# Altium PCB Switch Matrix PCB.PcbDoc (part 3 of 3)
Units mil, origin at the board's own origin, x right, y up, seen from the top; angles counter-clockwise.
Board outline 3937.01 x 7874.02 mil, 2 copper layers (Top Layer, Bottom Layer), stack 62.8 mil thick; 178 components, 222 nets, 852 pads, 317 vias.
Unrouted connection lines stored in the file: 1.
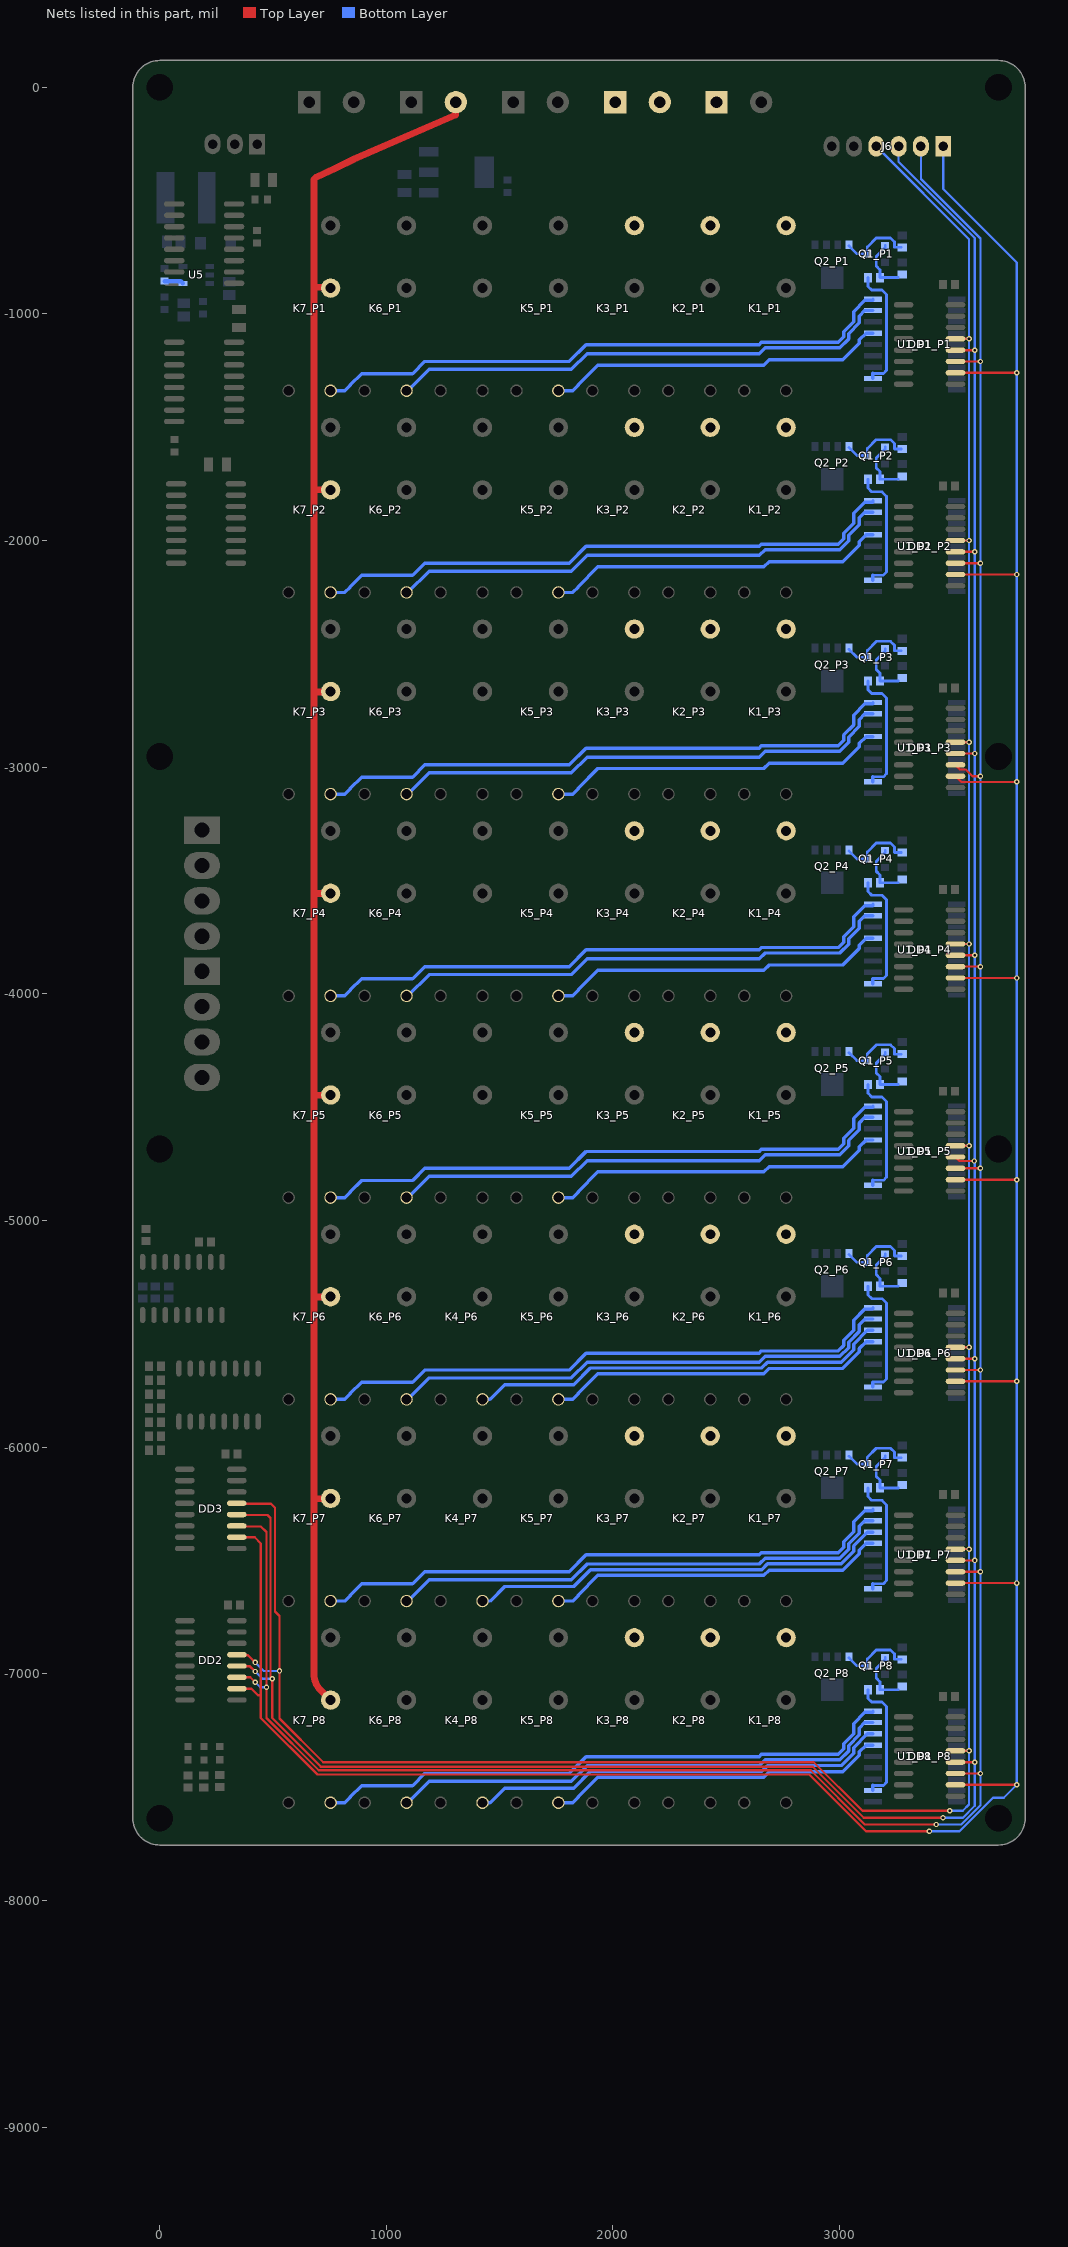
[diagram p3: the nets of this part, all layers, seen from the top]

## Via types
v1: diameter 23.62, hole 11.81, Top Layer to Bottom Layer, 315 vias
v2: diameter 31.5, hole 15.75, Top Layer to Bottom Layer, 2 vias

## Nets (pads, with @x,y where several pads share a name; then routed paths per layer and width w, separated by ;. In a path a pad name is that pad's centre, name@x,y a point inside that pad or via, vN(x,y) a via of type N, cw(c..) or ccw(c..) an arc to the next point about the centre after c; other vN are vias at no path point) (continued)
NetK4_P6_1: K4_P6.1 U1_P6.16 | length 1862.4
  Bottom Layer w15: K4_P6.1@1424.41,-5789.25 1457.72,-5789.25 1521.89,-5725.08 1826.89,-5725.08 1901.06,-5650.91 2656.06,-5650.91 2681.89,-5625.08 3006.89,-5625.08 3061.89,-5570.08 3061.89,-5546.23 3123.04,-5485.08 U1_P6.16@3146.85,-5485.08
NetK4_P7_1: K4_P7.1 U1_P7.16 | length 1862.4
  Bottom Layer w15: K4_P7.1@1424.41,-6679.25 1457.72,-6679.25 1521.89,-6615.08 1826.89,-6615.08 1901.06,-6540.91 2656.06,-6540.91 2681.89,-6515.08 3006.89,-6515.08 3061.89,-6460.08 3061.89,-6436.23 3123.04,-6375.08 U1_P7.16@3146.85,-6375.08
NetK4_P8_1: K4_P8.1 U1_P8.16 | length 1862.4
  Bottom Layer w15: K4_P8.1@1424.41,-7569.25 1457.72,-7569.25 1521.89,-7505.08 1826.89,-7505.08 1901.06,-7430.91 2656.06,-7430.91 2681.89,-7405.08 3006.89,-7405.08 3061.89,-7350.08 3061.89,-7326.23 3123.04,-7265.08 U1_P8.16@3146.85,-7265.08
NetK5_P1_1: K5_P1.1 U1_P1.15 | length 1502.8
  Bottom Layer w15: K5_P1.1@1759.41,-1339.25 1822.41,-1339.25 1846.38,-1315.28 1846.38,-1313.16 1933.63,-1225.91 2666.06,-1225.91 2688.89,-1203.08 3013.89,-1203.08 3086.89,-1130.08 3086.89,-1115.08 3116.89,-1085.08 U1_P1.15@3146.85,-1085.08
NetK5_P2_1: K5_P2.1 U1_P2.15 | length 1502.8
  Bottom Layer w15: K5_P2.1@1759.41,-2229.25 1822.41,-2229.25 1846.38,-2205.28 1846.38,-2203.16 1933.63,-2115.91 2666.06,-2115.91 2688.89,-2093.08 3013.89,-2093.08 3086.89,-2020.08 3086.89,-2005.08 3116.89,-1975.08 U1_P2.15@3146.85,-1975.08
NetK5_P3_1: K5_P3.1 U1_P3.15 | length 1502.8
  Bottom Layer w15: K5_P3.1@1759.41,-3119.25 1822.41,-3119.25 1846.38,-3095.28 1846.38,-3093.16 1933.63,-3005.91 2666.06,-3005.91 2688.89,-2983.08 3013.89,-2983.08 3086.89,-2910.08 3086.89,-2895.08 3116.89,-2865.08 U1_P3.15@3146.85,-2865.08
NetK5_P4_1: K5_P4.1 U1_P4.15 | length 1502.8
  Bottom Layer w15: K5_P4.1@1759.41,-4009.25 1822.41,-4009.25 1846.38,-3985.28 1846.38,-3983.16 1933.63,-3895.91 2666.06,-3895.91 2688.89,-3873.08 3013.89,-3873.08 3086.89,-3800.08 3086.89,-3785.08 3116.89,-3755.08 U1_P4.15@3146.85,-3755.08
NetK5_P5_1: K5_P5.1 U1_P5.15 | length 1502.8
  Bottom Layer w15: K5_P5.1@1759.41,-4899.25 1822.41,-4899.25 1846.38,-4875.28 1846.38,-4873.16 1933.63,-4785.91 2666.06,-4785.91 2688.89,-4763.08 3013.89,-4763.08 3086.89,-4690.08 3086.89,-4675.08 3116.89,-4645.08 U1_P5.15@3146.85,-4645.08
NetK5_P6_1: K5_P6.1 U1_P6.15 | length 1502.8
  Bottom Layer w15: K5_P6.1@1759.41,-5789.25 1822.41,-5789.25 1846.38,-5765.28 1846.38,-5763.16 1933.63,-5675.91 2666.06,-5675.91 2688.89,-5653.08 3013.89,-5653.08 3086.89,-5580.08 3086.89,-5565.08 3116.89,-5535.08 U1_P6.15@3146.85,-5535.08
NetK5_P7_1: K5_P7.1 U1_P7.15 | length 1502.8
  Bottom Layer w15: K5_P7.1@1759.41,-6679.25 1822.41,-6679.25 1846.38,-6655.28 1846.38,-6653.16 1933.63,-6565.91 2666.06,-6565.91 2688.89,-6543.08 3013.89,-6543.08 3086.89,-6470.08 3086.89,-6455.08 3116.89,-6425.08 U1_P7.15@3146.85,-6425.08
NetK5_P8_1: K5_P8.1 U1_P8.15 | length 1502.8
  Bottom Layer w15: K5_P8.1@1759.41,-7569.25 1822.41,-7569.25 1846.38,-7545.28 1846.38,-7543.16 1933.63,-7455.91 2666.06,-7455.91 2688.89,-7433.08 3013.89,-7433.08 3086.89,-7360.08 3086.89,-7345.08 3116.89,-7315.08 U1_P8.15@3146.85,-7315.08
NetK6_P1_1: K6_P1.1 U1_P1.17 | length 2235.7
  Bottom Layer w15: K6_P1.1@1089.41,-1339.25 1095.03,-1339.25 1189.2,-1245.08 1816.89,-1245.08 1886.06,-1175.91 2646.06,-1175.91 2671.89,-1150.08 3000.78,-1150.08 3039.89,-1110.97 3039.89,-1087.12 3086.89,-1040.12 3086.89,-1010.08 3111.89,-985.08 U1_P1.17@3146.85,-985.08
NetK6_P2_1: K6_P2.1 U1_P2.17 | length 2235.7
  Bottom Layer w15: K6_P2.1@1089.41,-2229.25 1095.03,-2229.25 1189.2,-2135.08 1816.89,-2135.08 1886.06,-2065.91 2646.06,-2065.91 2671.89,-2040.08 3000.78,-2040.08 3039.89,-2000.97 3039.89,-1977.12 3086.89,-1930.12 3086.89,-1900.08 3111.89,-1875.08 U1_P2.17@3146.85,-1875.08
NetK6_P3_1: K6_P3.1 U1_P3.17 | length 2235.7
  Bottom Layer w15: K6_P3.1@1089.41,-3119.25 1095.03,-3119.25 1189.2,-3025.08 1816.89,-3025.08 1886.06,-2955.91 2646.06,-2955.91 2671.89,-2930.08 3000.78,-2930.08 3039.89,-2890.97 3039.89,-2867.12 3086.89,-2820.12 3086.89,-2790.08 3111.89,-2765.08 U1_P3.17@3146.85,-2765.08
NetK6_P4_1: K6_P4.1 U1_P4.17 | length 2235.7
  Bottom Layer w15: K6_P4.1@1089.41,-4009.25 1095.03,-4009.25 1189.2,-3915.08 1816.89,-3915.08 1886.06,-3845.91 2646.06,-3845.91 2671.89,-3820.08 3000.78,-3820.08 3039.89,-3780.97 3039.89,-3757.12 3086.89,-3710.12 3086.89,-3680.08 3111.89,-3655.08 U1_P4.17@3146.85,-3655.08
NetK6_P5_1: K6_P5.1 U1_P5.17 | length 2235.7
  Bottom Layer w15: K6_P5.1@1089.41,-4899.25 1095.03,-4899.25 1189.2,-4805.08 1816.89,-4805.08 1886.06,-4735.91 2646.06,-4735.91 2671.89,-4710.08 3000.78,-4710.08 3039.89,-4670.97 3039.89,-4647.12 3086.89,-4600.12 3086.89,-4570.08 3111.89,-4545.08 U1_P5.17@3146.85,-4545.08
NetK6_P6_1: K6_P6.1 U1_P6.17 | length 2235.7
  Bottom Layer w15: K6_P6.1@1089.41,-5789.25 1095.03,-5789.25 1189.2,-5695.08 1816.89,-5695.08 1886.06,-5625.91 2646.06,-5625.91 2671.89,-5600.08 3000.78,-5600.08 3039.89,-5560.97 3039.89,-5537.12 3086.89,-5490.12 3086.89,-5460.08 3111.89,-5435.08 U1_P6.17@3146.85,-5435.08
NetK6_P7_1: K6_P7.1 U1_P7.17 | length 2235.7
  Bottom Layer w15: K6_P7.1@1089.41,-6679.25 1095.03,-6679.25 1189.2,-6585.08 1816.89,-6585.08 1886.06,-6515.91 2646.06,-6515.91 2671.89,-6490.08 3000.78,-6490.08 3039.89,-6450.97 3039.89,-6427.12 3086.89,-6380.12 3086.89,-6350.08 3111.89,-6325.08 U1_P7.17@3146.85,-6325.08
NetK6_P8_1: K6_P8.1 U1_P8.17 | length 2235.7
  Bottom Layer w15: K6_P8.1@1089.41,-7569.25 1095.03,-7569.25 1189.2,-7475.08 1816.89,-7475.08 1886.06,-7405.91 2646.06,-7405.91 2671.89,-7380.08 3000.78,-7380.08 3039.89,-7340.97 3039.89,-7317.12 3086.89,-7270.12 3086.89,-7240.08 3111.89,-7215.08 U1_P8.17@3146.85,-7215.08
NetK7_P1_1: K7_P1.1 U1_P1.18 | length 2604.6
  Bottom Layer w15: K7_P1.1@754.41,-1339.25 817.41,-1339.25 841.38,-1315.28 841.38,-1313.16 890.74,-1263.8 1115.79,-1263.8 1169.5,-1210.08 1806.89,-1210.08 1881.06,-1135.91 2644.95,-1135.91 2654.95,-1125.91 2993.84,-1125.91 3017.89,-1101.85 3017.89,-1078.01 3061.89,-1034.01 3061.89,-990.08 3111.24,-940.73 3147.32,-940.73 U1_P1.18@3147.32,-935.08
NetK7_P2_1: K7_P2.1 U1_P2.18 | length 2604.6
  Bottom Layer w15: K7_P2.1@754.41,-2229.25 817.41,-2229.25 841.38,-2205.28 841.38,-2203.16 890.74,-2153.8 1115.79,-2153.8 1169.5,-2100.08 1806.89,-2100.08 1881.06,-2025.91 2644.95,-2025.91 2654.95,-2015.91 2993.84,-2015.91 3017.89,-1991.85 3017.89,-1968.01 3061.89,-1924.01 3061.89,-1880.08 3111.24,-1830.73 3147.32,-1830.73 U1_P2.18@3147.32,-1825.08
NetK7_P3_1: K7_P3.1 U1_P3.18 | length 2604.6
  Bottom Layer w15: K7_P3.1@754.41,-3119.25 817.41,-3119.25 841.38,-3095.28 841.38,-3093.16 890.74,-3043.8 1115.79,-3043.8 1169.5,-2990.08 1806.89,-2990.08 1881.06,-2915.91 2644.95,-2915.91 2654.95,-2905.91 2993.84,-2905.91 3017.89,-2881.85 3017.89,-2858.01 3061.89,-2814.01 3061.89,-2770.08 3111.24,-2720.73 3147.32,-2720.73 U1_P3.18@3147.32,-2715.08
NetK7_P4_1: K7_P4.1 U1_P4.18 | length 2604.6
  Bottom Layer w15: K7_P4.1@754.41,-4009.25 817.41,-4009.25 841.38,-3985.28 841.38,-3983.16 890.74,-3933.8 1115.79,-3933.8 1169.5,-3880.08 1806.89,-3880.08 1881.06,-3805.91 2644.95,-3805.91 2654.95,-3795.91 2993.84,-3795.91 3017.89,-3771.85 3017.89,-3748.01 3061.89,-3704.01 3061.89,-3660.08 3111.24,-3610.73 3147.32,-3610.73 U1_P4.18@3147.32,-3605.08
NetK7_P5_1: K7_P5.1 U1_P5.18 | length 2604.6
  Bottom Layer w15: K7_P5.1@754.41,-4899.25 817.41,-4899.25 841.38,-4875.28 841.38,-4873.16 890.74,-4823.8 1115.79,-4823.8 1169.5,-4770.08 1806.89,-4770.08 1881.06,-4695.91 2644.95,-4695.91 2654.95,-4685.91 2993.84,-4685.91 3017.89,-4661.85 3017.89,-4638.01 3061.89,-4594.01 3061.89,-4550.08 3111.24,-4500.73 3147.32,-4500.73 U1_P5.18@3147.32,-4495.08
NetK7_P6_1: K7_P6.1 U1_P6.18 | length 2604.6
  Bottom Layer w15: K7_P6.1@754.41,-5789.25 817.41,-5789.25 841.38,-5765.28 841.38,-5763.16 890.74,-5713.8 1115.79,-5713.8 1169.5,-5660.08 1806.89,-5660.08 1881.06,-5585.91 2644.95,-5585.91 2654.95,-5575.91 2993.84,-5575.91 3017.89,-5551.85 3017.89,-5528.01 3061.89,-5484.01 3061.89,-5440.08 3111.24,-5390.73 3147.32,-5390.73 U1_P6.18@3147.32,-5385.08
NetK7_P7_1: K7_P7.1 U1_P7.18 | length 2604.6
  Bottom Layer w15: K7_P7.1@754.41,-6679.25 817.41,-6679.25 841.38,-6655.28 841.38,-6653.16 890.74,-6603.8 1115.79,-6603.8 1169.5,-6550.08 1806.89,-6550.08 1881.06,-6475.91 2644.95,-6475.91 2654.95,-6465.91 2993.84,-6465.91 3017.89,-6441.85 3017.89,-6418.01 3061.89,-6374.01 3061.89,-6330.08 3111.24,-6280.73 3147.32,-6280.73 U1_P7.18@3147.32,-6275.08
NetK7_P8_1: K7_P8.1 U1_P8.18 | length 2604.6
  Bottom Layer w15: K7_P8.1@754.41,-7569.25 817.41,-7569.25 841.38,-7545.28 841.38,-7543.16 890.74,-7493.8 1115.79,-7493.8 1169.5,-7440.08 1806.89,-7440.08 1881.06,-7365.91 2644.95,-7365.91 2654.95,-7355.91 2993.84,-7355.91 3017.89,-7331.85 3017.89,-7308.01 3061.89,-7264.01 3061.89,-7220.08 3111.24,-7170.73 3147.32,-7170.73 U1_P8.18@3147.32,-7165.08
NetQ1_P1_1: Q1_P1.1 R1_P1.2 R2_P1.1 | length 245.6
  Bottom Layer w12: Q1_P1.1@3201.26,-697.68 3201.26,-707.02 3161.89,-746.39 3161.89,-789.2 3178.46,-805.78 R2_P1.1@3178.46,-840.08 R1_P1.2@3258.46,-840.08
NetQ1_P1_3: Q1_P1.3 Q2_P1.4 R3_P1.2 | length 323
  Bottom Layer w12: Q2_P1.4@3041.89,-700.08 3076.89,-735.08 Q1_P1.3@3122.52,-735.08 3122.52,-704.45 3161.89,-665.08 3224.75,-665.08 3241.89,-682.22 3241.89,-706.65 R3_P1.2@3271.89,-706.65
NetQ1_P2_1: Q1_P2.1 R1_P2.2 R2_P2.1 | length 245.6
  Bottom Layer w12: Q1_P2.1@3201.26,-1587.68 3201.26,-1597.02 3161.89,-1636.39 3161.89,-1679.2 3178.46,-1695.78 R2_P2.1@3178.46,-1730.08 R1_P2.2@3258.46,-1730.08
NetQ1_P2_3: Q1_P2.3 Q2_P2.4 R3_P2.2 | length 323
  Bottom Layer w12: Q2_P2.4@3041.89,-1590.08 3076.89,-1625.08 Q1_P2.3@3122.52,-1625.08 3122.52,-1594.45 3161.89,-1555.08 3224.75,-1555.08 3241.89,-1572.22 3241.89,-1596.65 R3_P2.2@3271.89,-1596.65
NetQ1_P3_1: Q1_P3.1 R1_P3.2 R2_P3.1 | length 245.6
  Bottom Layer w12: Q1_P3.1@3201.26,-2477.68 3201.26,-2487.02 3161.89,-2526.39 3161.89,-2569.2 3178.46,-2585.78 R2_P3.1@3178.46,-2620.08 R1_P3.2@3258.46,-2620.08
NetQ1_P3_3: Q1_P3.3 Q2_P3.4 R3_P3.2 | length 323
  Bottom Layer w12: Q2_P3.4@3041.89,-2480.08 3076.89,-2515.08 Q1_P3.3@3122.52,-2515.08 3122.52,-2484.45 3161.89,-2445.08 3224.75,-2445.08 3241.89,-2462.22 3241.89,-2486.65 R3_P3.2@3271.89,-2486.65
NetQ1_P4_1: Q1_P4.1 R1_P4.2 R2_P4.1 | length 245.6
  Bottom Layer w12: Q1_P4.1@3201.26,-3367.68 3201.26,-3377.02 3161.89,-3416.39 3161.89,-3459.2 3178.46,-3475.78 R2_P4.1@3178.46,-3510.08 R1_P4.2@3258.46,-3510.08
NetQ1_P4_3: Q1_P4.3 Q2_P4.4 R3_P4.2 | length 323
  Bottom Layer w12: Q2_P4.4@3041.89,-3370.08 3076.89,-3405.08 Q1_P4.3@3122.52,-3405.08 3122.52,-3374.45 3161.89,-3335.08 3224.75,-3335.08 3241.89,-3352.22 3241.89,-3376.65 R3_P4.2@3271.89,-3376.65
NetQ1_P5_1: Q1_P5.1 R1_P5.2 R2_P5.1 | length 245.6
  Bottom Layer w12: Q1_P5.1@3201.26,-4257.68 3201.26,-4267.02 3161.89,-4306.39 3161.89,-4349.2 3178.46,-4365.78 R2_P5.1@3178.46,-4400.08 R1_P5.2@3258.46,-4400.08
NetQ1_P5_3: Q1_P5.3 Q2_P5.4 R3_P5.2 | length 323
  Bottom Layer w12: Q2_P5.4@3041.89,-4260.08 3076.89,-4295.08 Q1_P5.3@3122.52,-4295.08 3122.52,-4264.45 3161.89,-4225.08 3224.75,-4225.08 3241.89,-4242.22 3241.89,-4266.65 R3_P5.2@3271.89,-4266.65
NetQ1_P6_1: Q1_P6.1 R1_P6.2 R2_P6.1 | length 245.6
  Bottom Layer w12: Q1_P6.1@3201.26,-5147.68 3201.26,-5157.02 3161.89,-5196.39 3161.89,-5239.2 3178.46,-5255.78 R2_P6.1@3178.46,-5290.08 R1_P6.2@3258.46,-5290.08
NetQ1_P6_3: Q1_P6.3 Q2_P6.4 R3_P6.2 | length 323
  Bottom Layer w12: Q2_P6.4@3041.89,-5150.08 3076.89,-5185.08 Q1_P6.3@3122.52,-5185.08 3122.52,-5154.45 3161.89,-5115.08 3224.75,-5115.08 3241.89,-5132.22 3241.89,-5156.65 R3_P6.2@3271.89,-5156.65
NetQ1_P7_1: Q1_P7.1 R1_P7.2 R2_P7.1 | length 245.6
  Bottom Layer w12: Q1_P7.1@3201.26,-6037.68 3201.26,-6047.02 3161.89,-6086.39 3161.89,-6129.2 3178.46,-6145.78 R2_P7.1@3178.46,-6180.08 R1_P7.2@3258.46,-6180.08
NetQ1_P7_3: Q1_P7.3 Q2_P7.4 R3_P7.2 | length 323
  Bottom Layer w12: Q2_P7.4@3041.89,-6040.08 3076.89,-6075.08 Q1_P7.3@3122.52,-6075.08 3122.52,-6044.45 3161.89,-6005.08 3224.75,-6005.08 3241.89,-6022.22 3241.89,-6046.65 R3_P7.2@3271.89,-6046.65
NetQ1_P8_1: Q1_P8.1 R1_P8.2 R2_P8.1 | length 245.6
  Bottom Layer w12: Q1_P8.1@3201.26,-6927.68 3201.26,-6937.02 3161.89,-6976.39 3161.89,-7019.2 3178.46,-7035.78 R2_P8.1@3178.46,-7070.08 R1_P8.2@3258.46,-7070.08
NetQ1_P8_3: Q1_P8.3 Q2_P8.4 R3_P8.2 | length 323
  Bottom Layer w12: Q2_P8.4@3041.89,-6930.08 3076.89,-6965.08 Q1_P8.3@3122.52,-6965.08 3122.52,-6934.45 3161.89,-6895.08 3224.75,-6895.08 3241.89,-6912.22 3241.89,-6936.65 R3_P8.2@3271.89,-6936.65
NetR2_P1_2: R2_P1.2 U1_P1.11 | length 557
  Bottom Layer w12: R2_P1.2@3125.32,-840.08 3125.32,-878.5 3141.89,-895.08 3186.89,-895.08 3206.89,-915.08 3206.89,-1248.85 3192.85,-1262.89 3146.85,-1262.89
  Bottom Layer w15: U1_P1.11@3146.85,-1285.08 3146.85,-1262.89
NetR2_P2_2: R2_P2.2 U1_P2.11 | length 557
  Bottom Layer w12: R2_P2.2@3125.32,-1730.08 3125.32,-1768.5 3141.89,-1785.08 3186.89,-1785.08 3206.89,-1805.08 3206.89,-2138.85 3192.85,-2152.89 3146.85,-2152.89
  Bottom Layer w15: U1_P2.11@3146.85,-2175.08 3146.85,-2152.89
NetR2_P3_2: R2_P3.2 U1_P3.11 | length 557
  Bottom Layer w12: R2_P3.2@3125.32,-2620.08 3125.32,-2658.5 3141.89,-2675.08 3186.89,-2675.08 3206.89,-2695.08 3206.89,-3028.85 3192.85,-3042.89 3146.85,-3042.89
  Bottom Layer w15: U1_P3.11@3146.85,-3065.08 3146.85,-3042.89
NetR2_P4_2: R2_P4.2 U1_P4.11 | length 557
  Bottom Layer w12: R2_P4.2@3125.32,-3510.08 3125.32,-3548.5 3141.89,-3565.08 3186.89,-3565.08 3206.89,-3585.08 3206.89,-3918.85 3192.85,-3932.89 3146.85,-3932.89
  Bottom Layer w15: U1_P4.11@3146.85,-3955.08 3146.85,-3932.89
NetR2_P5_2: R2_P5.2 U1_P5.11 | length 557
  Bottom Layer w12: R2_P5.2@3125.32,-4400.08 3125.32,-4438.5 3141.89,-4455.08 3186.89,-4455.08 3206.89,-4475.08 3206.89,-4808.85 3192.85,-4822.89 3146.85,-4822.89
  Bottom Layer w15: U1_P5.11@3146.85,-4845.08 3146.85,-4822.89
NetR2_P6_2: R2_P6.2 U1_P6.11 | length 557
  Bottom Layer w12: R2_P6.2@3125.32,-5290.08 3125.32,-5328.5 3141.89,-5345.08 3186.89,-5345.08 3206.89,-5365.08 3206.89,-5698.85 3192.85,-5712.89 3146.85,-5712.89
  Bottom Layer w15: U1_P6.11@3146.85,-5735.08 3146.85,-5712.89
NetR2_P7_2: R2_P7.2 U1_P7.11 | length 557
  Bottom Layer w12: R2_P7.2@3125.32,-6180.08 3125.32,-6218.5 3141.89,-6235.08 3186.89,-6235.08 3206.89,-6255.08 3206.89,-6588.85 3192.85,-6602.89 3146.85,-6602.89
  Bottom Layer w15: U1_P7.11@3146.85,-6625.08 3146.85,-6602.89
NetR2_P8_2: R2_P8.2 U1_P8.11 | length 557
  Bottom Layer w12: R2_P8.2@3125.32,-7070.08 3125.32,-7108.5 3141.89,-7125.08 3186.89,-7125.08 3206.89,-7145.08 3206.89,-7478.85 3192.85,-7492.89 3146.85,-7492.89
  Bottom Layer w15: U1_P8.11@3146.85,-7515.08 3146.85,-7492.89
NetR5_1: R5.1 U5.4 | length 85
  Bottom Layer w20: R5.1@21.97,-855.35 93.06,-855.35 U5.4@102.91,-865.2
OE: DD1_P1.13 DD1_P2.13 DD1_P3.13 DD1_P4.13 DD1_P5.13 DD1_P6.13 DD1_P7.13 DD1_P8.13 DD2.13 DD3.13 J6.4 | length 12541.1
  Top Layer w10: DD3.13@339.76,-6247.8 342.05,-6250.08 491.38,-6250.08 508.88,-6267.58 508.88,-6725.08 528.88,-6745.08 v1(528.88,-6987.58) 528.88,-7197.58 721.38,-7390.08 2886.38,-7390.08 3101.38,-7605.08 v1(3486.38,-7605.08) ; DD2.13@340.87,-6915.91 343.47,-6918.51 389.81,-6918.51 v1(421.38,-6950.08) ; J6.4@3161.89,-270.91 J6.4@3161.89,-260.91 ; DD1_P8.13@3511.38,-7340.08 v1(3571.38,-7340.08) ; DD1_P7.13@3511.38,-6450.08 v1(3571.38,-6450.08) ; DD1_P6.13@3511.38,-5560.08 v1(3571.38,-5560.08) ; DD1_P5.13@3511.38,-4670.08 v1(3571.38,-4670.08) ; DD1_P4.13@3511.38,-3780.08 v1(3571.38,-3780.08) ; DD1_P3.13@3511.38,-2890.08 v1(3571.38,-2890.08) ; DD1_P2.13@3511.38,-2000.08 v1(3571.38,-2000.08) ; DD1_P1.13@3511.38,-1110.08 v1(3571.38,-1110.08)
  Top Layer w12: J6.4@3161.89,-260.91 3168.9,-260.91 J6.4@3170.79,-262.8
  Bottom Layer w10: v1(421.38,-6950.08) 421.38,-6955.08 421.93,-6954.53 425.83,-6954.53 458.88,-6987.58 v1(528.88,-6987.58) ; J6.4@3161.89,-270.91 3171.91,-270.91 3571.38,-670.38 v1(3571.38,-1110.08) v1(3571.38,-2000.08) v1(3571.38,-2890.08) v1(3571.38,-3780.08) v1(3571.38,-4670.08) v1(3571.38,-5560.08) v1(3571.38,-6450.08) v1(3571.38,-7340.08) 3571.38,-7577.37 3543.67,-7605.08 v1(3486.38,-7605.08)
RST: DD1_P1.10 DD1_P2.10 DD1_P3.10 DD1_P4.10 DD1_P5.10 DD1_P6.10 DD1_P7.10 DD1_P8.10 DD2.10 DD3.10 J6.1 | length 14196
  Top Layer w10: DD3.10@339.76,-6397.8 419.09,-6397.8 446.38,-6425.08 446.38,-7095.08 ; DD2.10@340.87,-7065.91 404.71,-7065.91 433.88,-7095.08 446.38,-7095.08 ; v1(3396.38,-7695.08) 3116.38,-7695.08 2866.38,-7445.08 696.38,-7445.08 446.38,-7195.08 446.38,-7095.08 ; J6.1@3457.17,-260.91 3475.79,-279.53 J6.1@3475.79,-282.8 ; DD1_P8.10@3511.38,-7490.08 v1(3781.38,-7490.08) ; DD1_P7.10@3511.38,-6600.08 v1(3781.38,-6600.08) ; DD1_P6.10@3511.38,-5710.08 v1(3781.38,-5710.08) ; DD1_P5.10@3511.38,-4820.08 v1(3781.38,-4820.08) ; DD1_P4.10@3511.38,-3930.08 v1(3781.38,-3930.08) ; DD1_P3.10@3511.38,-3040.08 3536.38,-3065.08 v1(3781.38,-3065.08) ; DD1_P2.10@3511.38,-2150.08 v1(3781.38,-2150.08) ; DD1_P1.10@3511.38,-1260.08 v1(3781.38,-1260.08)
  Bottom Layer w10: v1(3396.38,-7695.08) 3529.26,-7695.08 3676.76,-7547.58 3723.88,-7547.58 v1(3781.38,-7490.08) v1(3781.38,-6600.08) v1(3781.38,-5710.08) v1(3781.38,-4820.08) v1(3781.38,-3930.08) v1(3781.38,-3065.08) v1(3781.38,-2150.08) v1(3781.38,-1260.08) 3781.38,-773.38 3457.17,-449.16 J6.1@3457.17,-260.91
SHCP: DD1_P1.11 DD1_P2.11 DD1_P3.11 DD1_P4.11 DD1_P5.11 DD1_P6.11 DD1_P7.11 DD1_P8.11 DD2.11 DD3.11 J6.2 | length 12820.4
  Top Layer w10: DD3.11@339.76,-6347.8 342.05,-6350.08 446.38,-6350.08 471.38,-6375.08 v1(471.38,-7060.08) 471.38,-7195.08 702.38,-7426.08 2872.38,-7426.08 3111.38,-7665.08 v1(3426.38,-7665.08) ; DD2.11@340.87,-7015.91 399.71,-7015.91 v1(421.38,-7037.58) ; DD1_P8.11@3511.38,-7440.08 v1(3621.38,-7440.08) ; DD1_P7.11@3511.38,-6550.08 v1(3621.38,-6550.08) ; DD1_P6.11@3511.38,-5660.08 v1(3621.38,-5660.08) ; DD1_P5.11@3511.38,-4770.08 v1(3621.38,-4770.08) ; DD1_P4.11@3511.38,-3880.08 v1(3621.38,-3880.08) ; DD1_P3.11@3511.38,-2990.08 3531.38,-3010.08 3556.38,-3010.08 3586.38,-3040.08 v1(3621.38,-3040.08) ; DD1_P2.11@3511.38,-2100.08 v1(3621.38,-2100.08) ; DD1_P1.11@3511.38,-1210.08 v1(3621.38,-1210.08)
  Bottom Layer w10: v1(421.38,-7037.58) 443.88,-7060.08 v1(471.38,-7060.08) ; J6.2@3358.74,-260.91 3358.74,-404.74 3621.38,-667.38 v1(3621.38,-1210.08) v1(3621.38,-2100.08) v1(3621.38,-3040.08) v1(3621.38,-3880.08) v1(3621.38,-4770.08) v1(3621.38,-5660.08) v1(3621.38,-6550.08) v1(3621.38,-7440.08) 3621.38,-7580.33 3536.63,-7665.08 v1(3426.38,-7665.08)
STCP: DD1_P1.12 DD1_P2.12 DD1_P3.12 DD1_P4.12 DD1_P5.12 DD1_P6.12 DD1_P7.12 DD1_P8.12 DD2.12 DD3.12 J6.3 | length 12683.3
  Top Layer w10: DD3.12@339.76,-6297.8 342.05,-6300.08 476.38,-6300.08 488.88,-6312.58 488.88,-7015.08 v1(496.38,-7022.58) 496.38,-7195.08 711.38,-7410.08 2881.38,-7410.08 3106.38,-7635.08 v1(3456.38,-7635.08) ; DD2.12@340.87,-6965.91 342.54,-6967.58 398.88,-6967.58 v1(421.38,-6990.08) ; DD1_P8.12@3511.38,-7390.08 v1(3596.38,-7390.08) ; DD1_P7.12@3511.38,-6500.08 v1(3596.38,-6500.08) ; DD1_P6.12@3511.38,-5610.08 v1(3596.38,-5610.08) ; DD1_P5.12@3511.38,-4720.08 3529.13,-4737.83 v1(3594.19,-4737.83) ; DD1_P4.12@3511.38,-3830.08 v1(3596.38,-3830.08) ; DD1_P3.12@3511.38,-2940.08 v1(3596.38,-2940.08) ; DD1_P2.12@3511.38,-2050.08 v1(3596.38,-2050.08) ; DD1_P1.12@3511.38,-1160.08 v1(3596.38,-1160.08)
  Top Layer w12: J6.3@3260.32,-260.91 3263.9,-260.91 J6.3@3270.79,-267.8
  Bottom Layer w10: v1(421.38,-6990.08) 453.88,-7022.58 v1(496.38,-7022.58) ; J6.3@3260.32,-260.91 3260.32,-329.32 3596.38,-665.38 v1(3596.38,-1160.08) v1(3596.38,-2050.08) v1(3596.38,-2940.08) v1(3596.38,-3830.08) v1(3596.38,-5610.08) v1(3596.38,-6500.08) v1(3596.38,-7390.08) 3596.38,-7582.71 3544.01,-7635.08 v1(3456.38,-7635.08)
V: J4.1 K7_P1.2 K7_P2.2 K7_P3.2 K7_P4.2 K7_P5.2 K7_P6.2 K7_P7.2 K7_P8.2 | length 8573.5
  Top Layer w20: 680.79,-1776.5 680.79,-1777.8 ; 680.79,-407.17 689.09,-398.86 ; K7_P1.2@745.48,-882.8 cw(c745.48,-895.43) K7_P1.2@754.41,-886.5 ; K7_P7.2@753.11,-6227.8 K7_P7.2@754.41,-6226.5 ; K7_P6.2@753.11,-5337.8 K7_P6.2@754.41,-5336.5 ; K7_P5.2@753.11,-4447.8 K7_P5.2@754.41,-4446.5 ; K7_P4.2@753.11,-3557.8 K7_P4.2@754.41,-3556.5 ; K7_P3.2@753.11,-2667.8 K7_P3.2@754.41,-2666.5 ; 680.79,-1777.8 cw(c683.92,-1780.93) 683.92,-1776.5 ; 680.79,-1777.8 cw(c683.92,-1780.93) 683.92,-1776.5 ; 680.79,-1777.8 cw(c683.92,-1780.93) 683.92,-1776.5 ; 680.79,-1777.8 cw(c683.92,-1780.93) 683.92,-1776.5 ; 680.79,-1777.8 cw(c683.92,-1780.93) 683.92,-1776.5 ; 680.79,-1777.8 cw(c683.92,-1780.93) 683.92,-1776.5 ; 680.79,-1777.8 cw(c683.92,-1780.93) 683.92,-1776.5 ; 680.79,-1777.8 cw(c683.92,-1780.93) 683.92,-1776.5
  Top Layer w30: 680.79,-1777.8 680.79,-2667.8 ; 680.79,-1776.5 680.79,-882.8 ; 680.79,-407.17 680.79,-882.8 ; 683.92,-1776.5 K7_P2.2@754.41,-1776.5 ; 689.09,-398.86 775.79,-357.8 855.79,-317.8 1305.79,-122.8 J4.1@1306.89,-65.91 ; K7_P1.2@745.48,-882.8 680.79,-882.8 ; K7_P7.2@753.11,-6227.8 680.79,-6227.8 ; K7_P6.2@753.11,-5337.8 680.79,-5337.8 ; K7_P5.2@753.11,-4447.8 680.79,-4447.8 ; K7_P4.2@753.11,-3557.8 680.79,-3557.8 ; K7_P3.2@753.11,-2667.8 680.79,-2667.8 ; K7_P8.2@754.41,-7116.5 710.08,-7072.16 ; 680.79,-7001.45 ccw(c780.79,-7001.45) 710.08,-7072.16 ; 680.79,-7001.45 ccw(c780.79,-7001.45) 710.08,-7072.16 ; 680.79,-7001.45 ccw(c780.79,-7001.45) 710.08,-7072.16 ; 680.79,-7001.45 ccw(c780.79,-7001.45) 710.08,-7072.16 ; 680.79,-7001.45 ccw(c780.79,-7001.45) 710.08,-7072.16 ; 680.79,-7001.45 ccw(c780.79,-7001.45) 710.08,-7072.16 ; 680.79,-7001.45 ccw(c780.79,-7001.45) 710.08,-7072.16 ; 680.79,-7001.45 ccw(c780.79,-7001.45) 710.08,-7072.16 ; 680.79,-7001.45 680.79,-6227.8 ; 680.79,-6227.8 680.79,-5337.8 ; 680.79,-5337.8 680.79,-4447.8 ; 680.79,-4447.8 680.79,-3557.8 ; 680.79,-3557.8 680.79,-2667.8
VS1: J1.2 K1_P1.3 K1_P2.3 K1_P3.3 K1_P4.3 K1_P5.3 K1_P6.3 K1_P7.3 K1_P8.3
VS2: J2.1 K2_P1.3 K2_P2.3 K2_P3.3 K2_P4.3 K2_P5.3 K2_P6.3 K2_P7.3 K2_P8.3
VS3: J2.2 K3_P1.3 K3_P2.3 K3_P3.3 K3_P4.3 K3_P5.3 K3_P6.3 K3_P7.3 K3_P8.3
pads on no net: DD3.7 U6.6 U6.7 U6.10 U6.11
copper on no net: | length 8.3
  Top Layer w10: 3612.06,-9267.13 3617.91,-9261.27

## Polygon pours and split planes (outlines as drawn)
DC_PIN8 on Bottom Layer "Bottom Layer-DC_PIN8" (solid, pour order 119): 105.78,-4287.8 240.83,-4287.8 cw(c240.83,-4327.66) 280.69,-4327.76 255,-6140 ccw(c996.75,-6166.15) 349.71,-6529.77 419.31,-6644.6 ccw(c649.06,-6505.36) 581.23,-6765.31 659.5,-6785.73 705.79,-6782.8 715.45,-7007.76 590.8,-6972.39 cw(c802.48,-6344.37) 216,-6653 165,-6564 cw(c689.52,-6231.86) 68.92,-6248.98 85.18,-5255.05 ccw(c-798.56,-5227.31) 61.94,-5024.04 51.95,-4986.39 cw(c426.73,-4886.96) 51.54,-4789.09 66.11,-4733.22 ccw(c-521.53,-4579.89) 85.79,-4579.85 85.79,-4506.54 ccw(c14.73,-4506.53) 62.33,-4453.78 cw(c85.79,-4427.8) 50.79,-4427.8 50.79,-4342.8 cw(c105.78,-4342.8)
DC_PIN1 on Bottom Layer "Bottom Layer-DC_PIN1" (solid, pour order 111): 303.25,-3314.12 ccw(c-470.61,-3280.99) 300.73,-3210.08 ccw(c-1275.16,-3516.84) 256.13,-3034.39 cw(c762.11,-2875.14) 242.69,-2767.5 cw(c1671.58,-3063.59) 282.19,-2617.51 ccw(c-640.72,-2321.2) 327.71,-2362.68 332.91,-2241.66 cw(c1036.36,-2181.61) 360.69,-1976.86 376.38,-1925.08 489.51,-1405.69 ccw(c-421.4,-1100.47) 521.38,-1285.08 666.38,-900.08 cw(c789.76,-925.23) 776.25,-800.04 cw(c954.34,-1229.65) 820.96,-784.12 cw(c899.87,-1310.5) 897.51,-778.24 643.7,-584.25 cw(c623.85,-591.99) 632.42,-611.49 ccw(c695.01,-669.49) 611.43,-652.28 ccw(c747.41,-807.66) 575.37,-693.48 ccw(c631.39,-767.3) 557.58,-711.28 494.3,-774.56 ccw(c950.97,-1094.42) 421.38,-920.08 cw(c-2418.96,-158.06) 332.91,-1195.08 cw(c-3175.36,-308.82) 243.79,-1493.23 ccw(c4717,-2269.97) 213.08,-1697.54 ccw(c2314.31,-2214.25) 150.72,-2182.12 ccw(c4173.36,-2242.14) 150.51,-2198.23 ccw(c950.8,-2298.26) 145.59,-2344.11 cw(c-391.49,-2374.77) 120.53,-2539.79 ccw(c1358.66,-2938.63) 58.46,-2899.8 ccw(c12135.07,-3313.3) 51.38,-3315.08 ccw(c88.26,-3315.1) 88.27,-3351.98 199.82,-3351.98 263.75,-3351.98 ccw(c263.75,-3312.44)
DC_PIN6 on Bottom Layer "Bottom Layer-DC_PIN6" (solid, pour order 115): 95.79,-3977.8 290.79,-3977.8 534.36,-4207.32 cw(c409.27,-4340.07) 591.67,-4338.46 594.07,-4610.62 cw(c192.76,-4614.18) 566.5,-4760.42 526.37,-4862.97 ccw(c580.19,-4884.03) 544.32,-4929.34 616.06,-4986.14 ccw(c680.17,-4905.16) 682.43,-5008.42 710.79,-5007.8 715.45,-5227.76 676.31,-5213.86 cw(c695.77,-5159.06) 658.12,-5203.38 598.88,-5153.03 ccw(c-241.34,-5854.7) 477.54,-5029.16 cw(c673.29,-4804.41) 409.85,-4943.8 cw(c517.66,-4886.76) 402.18,-4847.49 ccw(c-201.27,-4642.32) 435.79,-4662.51 435.79,-4353.18 ccw(c298.88,-4353.13) 391.22,-4252.05 283.49,-4153.55 ccw(c230.04,-4211.99) 230.03,-4132.8 100.79,-4132.8 cw(c100.79,-4082.8) 50.79,-4082.8 50.79,-4022.8 cw(c95.79,-4022.8)
DC_PIN3 on Bottom Layer "Bottom Layer-DC_PIN3" (solid, pour order 107): 50.79,-3557.8 50.79,-3612.8 ccw(c100.78,-3612.8) 100.79,-3662.8 223.69,-3662.8 ccw(c223.69,-3526.84) 284.5,-3648.44 448.05,-3566.66 ccw(c300.22,-3271.01) 608.17,-3391.16 ccw(c307.96,-3318.3) 555.13,-3132.97 cw(c837.75,-3024.7) 567.07,-2889.32 cw(c1653.72,-3326.4) 704.52,-2640.2 738.71,-2560.93 935.79,-2557.8 630.79,-2392.8 cw(c392.61,-2392.81) 602.37,-2505.64 458.1,-2773.94 ccw(c953.2,-3039.88) 431.99,-3250.08 cw(c321.64,-3303.58) 441.38,-3330.08 cw(c271.09,-3315) 417.35,-3403.51 393.38,-3438.29 cw(c347.15,-3406.44) 377.54,-3453.65 331.81,-3483.09 cw(c217.07,-3310.8) 217.05,-3517.8 90.79,-3517.8 ccw(c90.78,-3557.79)
DC_PIN5 on Bottom Layer "Bottom Layer-DC_PIN5" (solid, pour order 99): 85.79,-3822.8 319.7,-3822.8 cw(c319.7,-3923.99) 405.51,-3870.36 505.79,-4022.8 ccw(c625.92,-3966.66) 567.24,-4085.57 603.63,-4103.53 ccw(c664.79,-3979.6) 664.79,-4117.8 685.79,-4117.8 561.89,-4246.22 497.83,-4185.09 390.79,-4087.8 297.41,-3998.48 ccw(c245.88,-4052.34) 245.87,-3977.8 95.79,-3977.8 cw(c95.79,-3932.8) 50.79,-3932.8 50.79,-3857.8 cw(c85.79,-3857.8)
GND on Bottom Layer "Bottom Layer-GND" (solid, pour order 139): 3005.79,-6947.8 2870.79,-6947.8 cw(c2870.78,-6927.8) 2850.79,-6927.8 2850.79,-6807.8 cw(c2875.79,-6807.8) 2875.79,-6782.8 2980.79,-6782.79 cw(c2980.79,-6807.79) 3005.79,-6807.8
GND on Bottom Layer "Bottom Layer-GND 1" (solid, pour order 137): 3005.79,-6057.8 2870.79,-6057.8 cw(c2870.78,-6037.8) 2850.79,-6037.8 2850.79,-5917.8 cw(c2875.79,-5917.8) 2875.79,-5892.8 2980.79,-5892.79 cw(c2980.79,-5917.79) 3005.79,-5917.8
GND on Bottom Layer "Bottom Layer-GND 2" (solid, pour order 135): 3005.79,-5167.8 2870.79,-5167.8 cw(c2870.78,-5147.8) 2850.79,-5147.8 2850.79,-5027.8 cw(c2875.79,-5027.8) 2875.79,-5002.8 2980.79,-5002.79 cw(c2980.79,-5027.79) 3005.79,-5027.8
GND on Bottom Layer "Bottom Layer-GND 3" (solid, pour order 133): 3005.79,-4277.8 2870.79,-4277.8 cw(c2870.78,-4257.8) 2850.79,-4257.8 2850.79,-4137.8 cw(c2875.79,-4137.8) 2875.79,-4112.8 2980.79,-4112.79 cw(c2980.79,-4137.79) 3005.79,-4137.8
GND on Bottom Layer "Bottom Layer-GND 4" (solid, pour order 131): 3005.79,-3387.8 2870.79,-3387.8 cw(c2870.78,-3367.8) 2850.79,-3367.8 2850.79,-3247.8 cw(c2875.79,-3247.8) 2875.79,-3222.8 2980.79,-3222.79 cw(c2980.79,-3247.79) 3005.79,-3247.8
GND on Bottom Layer "Bottom Layer-GND 5" (solid, pour order 129): 3005.79,-2497.8 2870.79,-2497.8 cw(c2870.78,-2477.8) 2850.79,-2477.8 2850.79,-2357.8 cw(c2875.79,-2357.8) 2875.79,-2332.8 2980.79,-2332.79 cw(c2980.79,-2357.79) 3005.79,-2357.8
GND on Bottom Layer "Bottom Layer-GND 6" (solid, pour order 127): 3005.79,-717.8 2870.79,-717.8 cw(c2870.78,-697.8) 2850.79,-697.8 2850.79,-577.8 cw(c2875.79,-577.8) 2875.79,-552.8 2980.79,-552.79 cw(c2980.79,-577.79) 3005.79,-577.8
GND on Bottom Layer "Bottom Layer-GND 7" (solid, pour order 125): 3005.79,-1607.8 2870.79,-1607.8 cw(c2870.78,-1587.8) 2850.79,-1587.8 2850.79,-1467.8 cw(c2875.79,-1467.8) 2875.79,-1442.8 2980.79,-1442.79 cw(c2980.79,-1467.79) 3005.79,-1467.8
DC_PIN7 on Bottom Layer "Bottom Layer-DC_PIN7" (solid, pour order 117): 95.78,-4137.8 227.86,-4137.8 cw(c227.86,-4259) 310.75,-4170.58 408.83,-4262.52 cw(c350.49,-4324.75) 435.79,-4324.75 435.79,-4860.25 440.79,-4912.06 440.79,-5612.24 ccw(c750.42,-5612.24) 505.26,-5801.37 529.66,-5833 ccw(c651.3,-5739.16) 651.3,-5892.8 705.79,-5892.8 715.45,-6117.76 608.77,-6117.78 cw(c608.73,-5882.15) 425.03,-6029.71 340.26,-5924.19 cw(c656.8,-5669.92) 250.79,-5669.92 250.79,-5135.14 ccw(c-236.45,-5135.13) 220.45,-4965.89 cw(c381.25,-4906.33) 216.6,-4858.43 231.78,-4806.25 ccw(c-950.22,-4462.38) 280.79,-4462.36 280.79,-4362.8 ccw(c210.79,-4362.79) 210.79,-4292.8 110.79,-4292.8 cw(c110.79,-4232.8) 50.79,-4232.8 50.79,-4182.8 cw(c95.78,-4182.8)
DC_PIN2 on Bottom Layer "Bottom Layer-DC_PIN2" (solid, pour order 109): 50.79,-3407.8 50.79,-3467.8 ccw(c95.78,-3467.81) 95.79,-3512.8 210.79,-3512.8 255.47,-3514.2 ccw(c248.16,-3327.52) 378.78,-3461.1 ccw(c140.16,-3284.58) 402.69,-3423.05 ccw(c157.29,-3293.58) 426.13,-3224.93 404.45,-3140.01 cw(c982.5,-2992.42) 410.59,-2822.59 cw(c1216.14,-3061.79) 419.4,-2794.7 421.06,-2781.98 cw(c896.59,-2844.31) 462.65,-2640.1 ccw(c-133.03,-2419.73) 496.38,-2504.8 ccw(c141.14,-2399.54) 510.79,-2424.73 510.79,-2326.03 cw(c1510.45,-2326.03) 556.69,-2026.59 590.7,-1918.25 cw(c949.73,-2030.96) 811.57,-1680.94 cw(c916.09,-2090) 916.13,-1667.8 950.79,-1667.8 625.79,-1487.8 cw(c547.55,-1487.81) 599.7,-1546.13 ccw(c895.42,-1876.64) 492.26,-1691.86 420.79,-1847.8 361.96,-2002.21 ccw(c947.92,-2225.45) 323.54,-2283.1 cw(c-410.64,-2350.9) 312.28,-2495.82 291.38,-2600.08 ccw(c1754.64,-3031.75) 238.04,-2866.26 ccw(c699.78,-2967.57) 234.75,-3052.5 ccw(c1477.91,-2825.51) 297.57,-3276.92 cw(c42.55,-3299.8) 298.32,-3311.47 cw(c244.65,-3309.07) 244.64,-3362.79 95.79,-3362.8 ccw(c95.78,-3407.79)
no net on Bottom Layer "Bottom Layer-No Net" (solid, pour order 105): 50.79,-3512.8
DC_PIN4 on Bottom Layer "Bottom Layer-DC_PIN4" (solid, pour order 103): 79.12,-3812.8 315.2,-3812.79 ccw(c315.21,-3580.22) 432.21,-3781.22 672.11,-3641.58 ccw(c643.09,-3591.71) 700.79,-3591.71 700.79,-3548.59 cw(c766.35,-3548.59) 743.78,-3487.03 850.79,-3447.8 990.79,-3447.8 629.91,-3312.79 ccw(c3716.66,-4427.13) 593.73,-3418.6 cw(c355.01,-3341.51) 472.81,-3563 304.05,-3652.76 cw(c218.34,-3491.63) 214.27,-3674.1 102.34,-3671.61 ccw(c101.22,-3722.02) 50.79,-3722.03 50.79,-3777.8 ccw(c95.78,-3777.8) 56.08,-3798.97 ccw(c79.12,-3786.68)
DC_PIN5 on Bottom Layer "Bottom Layer-DC_PIN1 5" (solid, pour order 74): 1460.79,-4110.68 1465.79,-4115.68 1465.79,-4285.68 cw(c1410.79,-4285.68) 1410.79,-4340.68 729.77,-4340.68 cw(c729.43,-4161.25) 598.89,-4284.34 ccw(c-742.4,-5548.99) 497.83,-4185.09 542.52,-4116.05
DC_PIN4 on Bottom Layer "Bottom Layer-DC_PIN1 5" (solid, pour order 73): 1484.41,-3220.91 1489.41,-3225.91 1489.41,-3395.91 cw(c1434.41,-3395.91) 1434.41,-3450.91 750.44,-3450.91 cw(c750.12,-3280.19) 661.31,-3425.98 cw(c695.89,-3369.21) 629.41,-3369.2 629.41,-3294.42 cw(c698.32,-3294.42) 697.92,-3225.51
DC_PIN3 on Bottom Layer "Bottom Layer-DC_PIN1 5" (solid, pour order 72): 1484.41,-2330.91 1489.41,-2335.91 1489.41,-2505.91 cw(c1434.41,-2505.91) 1434.41,-2560.91 750.44,-2560.91 cw(c750.12,-2390.19) 661.31,-2535.98 cw(c695.89,-2479.21) 629.41,-2479.2 629.41,-2365.99 cw(c659.68,-2365.99) 659.5,-2335.73
DC_PIN8 on Bottom Layer "Bottom Layer-DC_PIN1 5" (solid, pour order 71): 1484.41,-6780.91 1489.41,-6785.91 1489.41,-6955.91 cw(c1434.41,-6955.91) 1434.41,-7010.91 750.44,-7010.91 cw(c750.12,-6840.19) 661.31,-6985.98 cw(c695.89,-6929.21) 629.41,-6929.2 629.41,-6815.99 cw(c659.68,-6815.99) 659.5,-6785.73
NetK1_P8_2 on Bottom Layer "Bottom Layer-NetK1_P1_2 4" (solid, pour order 82): 1352.58,-7033.1 ccw(c1350.87,-7134.55) 1249.41,-7134.93 1249.41,-7235.91 ccw(c1349.41,-7235.91) 1305.82,-7325.91 2768,-7325.91 ccw(c2724.41,-7235.91) 2824.41,-7235.91 2824.41,-7107.59 ccw(c2736.85,-7121.97) 2715.24,-7035.91 cw(c2128.64,38969.14)
DC_PIN7 on Bottom Layer "Bottom Layer-DC_PIN1 5" (solid, pour order 70): 1484.41,-5890.91 1489.41,-5895.91 1489.41,-6065.91 cw(c1434.41,-6065.91) 1434.41,-6120.91 750.44,-6120.91 cw(c750.12,-5950.19) 661.31,-6095.98 cw(c695.89,-6039.21) 629.41,-6039.2 629.41,-5925.99 cw(c659.68,-5925.99) 659.5,-5895.73
NetK1_P7_2 on Bottom Layer "Bottom Layer-NetK1_P1_2 4" (solid, pour order 81): 1352.58,-6143.1 ccw(c1350.87,-6244.55) 1249.41,-6244.93 1249.41,-6345.91 ccw(c1349.41,-6345.91) 1305.82,-6435.91 2768,-6435.91 ccw(c2724.41,-6345.91) 2824.41,-6345.91 2824.41,-6217.59 ccw(c2736.85,-6231.97) 2715.24,-6145.91 cw(c2128.64,39859.14)
DC_PIN6 on Bottom Layer "Bottom Layer-DC_PIN1 5" (solid, pour order 69): 1484.41,-5000.91 1489.41,-5005.91 1489.41,-5175.91 cw(c1434.41,-5175.91) 1434.41,-5230.91 750.44,-5230.91 cw(c750.12,-5060.19) 661.31,-5205.98 cw(c695.89,-5149.21) 629.41,-5149.2 629.41,-5035.99 cw(c659.68,-5035.99) 659.5,-5005.73
NetK1_P6_2 on Bottom Layer "Bottom Layer-NetK1_P1_2 4" (solid, pour order 80): 1352.58,-5253.1 ccw(c1350.87,-5354.55) 1249.41,-5354.93 1249.41,-5455.91 ccw(c1349.41,-5455.91) 1305.82,-5545.91 2768,-5545.91 ccw(c2724.41,-5455.91) 2824.41,-5455.91 2824.41,-5327.59 ccw(c2736.85,-5341.97) 2715.24,-5255.91 cw(c2128.64,40749.14)
NetK1_P5_2 on Bottom Layer "Bottom Layer-NetK1_P1_2 4" (solid, pour order 79): 1352.58,-4363.1 ccw(c1350.87,-4464.55) 1249.41,-4464.93 1249.41,-4565.91 ccw(c1349.41,-4565.91) 1305.82,-4655.91 2768,-4655.91 ccw(c2724.41,-4565.91) 2824.41,-4565.91 2824.41,-4437.59 ccw(c2736.85,-4451.97) 2715.24,-4365.91 cw(c2128.64,41639.14)
NetK1_P4_2 on Bottom Layer "Bottom Layer-NetK1_P1_2 4" (solid, pour order 78): 1352.58,-3473.1 ccw(c1350.87,-3574.55) 1249.41,-3574.93 1249.41,-3675.91 ccw(c1349.41,-3675.91) 1305.82,-3765.91 2768,-3765.91 ccw(c2724.41,-3675.91) 2824.41,-3675.91 2824.41,-3547.59 ccw(c2736.85,-3561.97) 2715.24,-3475.91 cw(c2128.64,42529.14)
NetK1_P3_2 on Bottom Layer "Bottom Layer-NetK1_P1_2 4" (solid, pour order 77): 1352.58,-2583.1 ccw(c1350.87,-2684.55) 1249.41,-2684.93 1249.41,-2785.91 ccw(c1349.41,-2785.91) 1305.82,-2875.91 2768,-2875.91 ccw(c2724.41,-2785.91) 2824.41,-2785.91 2824.41,-2657.59 ccw(c2736.85,-2671.97) 2715.24,-2585.91 cw(c2128.64,43419.14)
DC_PIN2 on Bottom Layer "Bottom Layer-DC_PIN1 5" (solid, pour order 68): 1484.41,-1440.91 1489.41,-1445.91 1489.41,-1615.91 cw(c1434.41,-1615.91) 1434.41,-1670.91 750.44,-1670.91 cw(c750.12,-1500.19) 661.31,-1645.98 cw(c695.89,-1589.21) 629.41,-1589.2 629.41,-1475.99 cw(c659.68,-1475.99) 659.5,-1445.73
NetK1_P2_2 on Bottom Layer "Bottom Layer-NetK1_P1_2 4" (solid, pour order 76): 1352.58,-1693.1 ccw(c1350.87,-1794.55) 1249.41,-1794.93 1249.41,-1895.91 ccw(c1349.41,-1895.91) 1305.82,-1985.91 2768,-1985.91 ccw(c2724.41,-1895.91) 2824.41,-1895.91 2824.41,-1767.59 ccw(c2736.85,-1781.97) 2715.24,-1695.91 cw(c2128.64,44309.14)
NetK1_P1_2 on Bottom Layer "Bottom Layer-NetK1_P1_2 4" (solid, pour order 75): 1352.58,-803.1 ccw(c1350.87,-904.55) 1249.41,-904.93 1249.41,-1005.91 ccw(c1349.41,-1005.91) 1305.82,-1095.91 2768,-1095.91 ccw(c2724.41,-1005.91) 2824.41,-1005.91 2824.41,-877.59 ccw(c2736.85,-891.97) 2715.24,-805.91 cw(c2128.64,45199.14)
DC_PIN1 on Bottom Layer "Bottom Layer-DC_PIN1 5" (solid, pour order 67): 1484.41,-550.91 1489.41,-555.91 1489.41,-725.91 cw(c1434.41,-725.91) 1434.41,-780.91 750.44,-780.91 cw(c750.12,-610.19) 661.31,-755.98 cw(c695.89,-699.21) 629.41,-699.21 629.41,-634.45 cw(c708.41,-634.45) 707.95,-555.45
A- on Top Layer "Top Layer-A- 1" (solid, pour order 89): 1145.79,-557.8 1145.79,-7257.21 cw(c1089,-7257.21) 1089,-7314 903,-7314 cw(c903,-7261.79) 850.79,-7261.79 850.79,-557.8
A+ on Top Layer "Top Layer-A+" (solid, pour order 88): 1815.79,-557.8 1815.79,-6992.8 cw(c1770.79,-6992.8) 1770.79,-7037.8 1570.79,-7037.8 cw(c1570.79,-6987.8) 1520.79,-6987.8 1520.79,-557.8
VS3 on Top Layer "Top Layer-VS3 1" (solid, pour order 87): 2150.79,-557.8 2150.79,-6982.8 cw(c2095.79,-6982.8) 2095.79,-7037.8 1905.79,-7037.8 cw(c1905.79,-6987.8) 1855.79,-6987.8 1855.79,-557.8
VS2 on Top Layer "Top Layer-VS2 1" (solid, pour order 86): 2485.79,-557.8 2485.79,-6982.8 cw(c2430.79,-6982.8) 2430.79,-7037.8 2245.79,-7037.8 cw(c2245.79,-6982.8) 2190.79,-6982.8 2190.79,-557.8
VS1 on Top Layer "Top Layer-VS1 1" (solid, pour order 85): 2820.79,-557.8 2820.79,-6982.8 cw(c2765.79,-6982.8) 2765.79,-7037.8 2580.79,-7037.8 cw(c2580.79,-6982.8) 2525.79,-6982.8 2525.79,-557.8
GND on Top Layer "Top Layer-GND" (solid, pour order 121): 2565.79,52.2 2565.79,-223.96 ccw(c2717.71,-223.96) 2612.25,-333.32 2830.63,-543.9 cw(c2784.9,-591.33) 2850.79,-591.33 2850.79,-7187.8 ccw(c2900.79,-7187.8) 2900.79,-7237.8 3170.79,-7237.8 ccw(c3170.79,-7182.8) 3225.79,-7182.8 3225.79,-643.55 ccw(c3020.5,-643.55) 3152.42,-486.26 2932.21,-301.57 cw(c2961.75,-266.36) 2915.79,-266.36 2915.79,52.21 ccw(c2875.79,52.21) 2875.79,92.2 2605.79,92.2 ccw(c2605.79,52.21)
A- on Top Layer "Top Layer-A-" (solid, pour order 95): 1625.79,42.94 1625.79,-189.59 cw(c1510.11,-189.59) 1559.63,-294.13 1183.09,-472.49 ccw(c1209.29,-527.81) 1148.24,-523.45 1145.79,-557.8 850.79,-557.8 850.79,-450.87 cw(c984.04,-450.87) 931.82,-328.28 1342.19,-153.49 ccw(c1310.88,-79.98) 1390.79,-79.97 1390.79,41.56 cw(c1437.41,41.56) 1436.42,88.17 1576.54,91.16 cw(c1577.56,42.94)
no net on Top Layer "Top Layer-No Net" (solid, pour order 94): 1565.79,-382.8
A+ on Top Layer "Top Layer-No Net 1" (solid, pour order 93): 1865.79,52.2 1865.79,-164.91 cw(c591.52,-164.91) 1845.94,-388.92 1815.79,-557.8 1520.79,-557.8 1626.68,-324.82 ccw(c1432.65,-236.63) 1645.79,-236.63 1645.79,47.2 cw(c1690.79,47.21) 1690.79,92.2 1825.79,92.2 cw(c1825.79,52.2)
VS3 on Top Layer "Top Layer-VS3" (solid, pour order 92): 2100.79,52.2 2100.79,-221.35 ccw(c2737.86,-221.36) 2110.71,-333.36 2150.79,-557.8 1855.79,-557.8 1885.79,-262.8 1885.79,52.21 cw(c1925.79,52.2) 1925.79,92.2 2060.79,92.2 cw(c2060.79,52.2)
VS2 on Top Layer "Top Layer-VS2" (solid, pour order 91): 2120.79,52.21 2120.79,-209.38 ccw(c2735.75,-209.38) 2140.47,-363.7 2190.79,-557.8 2485.79,-557.8 2324.81,-340 cw(c2361.85,-312.62) 2315.79,-312.62 2315.79,52.2 ccw(c2275.79,52.2) 2275.79,92.2 2160.79,92.2 ccw(c2160.79,52.2)
VS1 on Top Layer "Top Layer-VS1" (solid, pour order 90): 2550.78,52.2 2550.79,-235.62 ccw(c2684.26,-235.62) 2609.99,-346.52 cw(c-10128.03,-13295.83) 2819.61,-556.11 cw(c2805.04,-559.75) 2797.59,-572.8 2562,-572.8 cw(c2562,-521.59) 2525.79,-557.8 2360.79,-347.8 cw(c2421.14,-287.44) 2335.79,-287.44 2335.79,52.2 cw(c2375.79,52.21) 2375.79,92.2 2510.79,92.2 cw(c2510.79,52.21)
no net on Top Layer "Top Layer-No Net 2" (solid, pour order 84): 2570.79,-7007.8
no net on Top Layer "Top Layer-No Net 3" (solid, pour order 83): 2820.79,-557.8

## Silkscreen, mask and mechanical layers (free items; w line width, h text height)
Top Overlay:
  lines w10: -90,-5615 -90,-6410 -55,-6445
  text "A-" at 1590,-370 h50 r90
  text "A+" at 1795,-370 h50 r90
  text "VOL" at 1350,-385 h50 r90
  text "VS1" at 2475,-385 h50 r90
  text "+5V" at 1140,-390 h50 r90
  text "VS3" at 2030,-390 h50 r90
  text "VS2" at 2240,-390 h50 r90
  text "GND" at 2690,-390 h50 r90
  text "+12V" at 893.34,-425.35 h50 r90
  text "AGND" at 685,-435 h50 r90
Bottom Overlay:
  text "+5V" at 1170,5 h50
  text "VOL" at 1385,5 h50
  text "MUX3" at 215,-190 h32 r270
  text "MUX2" at 315,-190 h32 r270
  text "MUX1" at 415,-190 h32 r270
  text "DIN" at 2955,-200 h32 r270
  text "DOUT" at 3050,-200 h32 r270
  text "OE" at 3145,-200 h32 r270
  text "STCP" at 3245,-200 h32 r270
  text "SHCP" at 3345,-200 h32 r270
  text "RST" at 3440,-200 h32 r270
  text "A+" at 1740,-225 h50 r270
  text "A-" at 1545,-230 h50 r270
  text "VS1" at 2430,-265 h50 r270
  text "VS3" at 1985,-285 h50 r270
  text "VS2" at 2185,-285 h50 r270
  text "GND" at 2635,-285 h50 r270
  text "+12V" at 835,-325 h50 r270
  text "AGND" at 640,-335 h50 r270
Outline:
  the board outline again, w10
Courtyard Bottom:
  lines w0.1: 150.97,-718.3 152.97,-716.3

## Text inside footprints (layer, text, board x,y; h text height)
DD1_P1: Assembly Text Top "74HC595" at 3421.89,-1280.08 h78.74 r90; Dimensions Top "1.45" at 3421.89,-1200.08 h78.74 r90
DD1_P2: Assembly Text Top "74HC595" at 3421.89,-2170.08 h78.74 r90; Dimensions Top "1.45" at 3421.89,-2090.08 h78.74 r90
DD1_P3: Assembly Text Top "74HC595" at 3421.89,-3060.08 h78.74 r90; Dimensions Top "1.45" at 3421.89,-2980.08 h78.74 r90
DD1_P4: Assembly Text Top "74HC595" at 3421.89,-3950.08 h78.74 r90; Dimensions Top "1.45" at 3421.89,-3870.08 h78.74 r90
DD1_P5: Assembly Text Top "74HC595" at 3421.89,-4840.08 h78.74 r90; Dimensions Top "1.45" at 3421.89,-4760.08 h78.74 r90
DD1_P6: Assembly Text Top "74HC595" at 3421.89,-5730.08 h78.74 r90; Dimensions Top "1.45" at 3421.89,-5650.08 h78.74 r90
DD1_P7: Assembly Text Top "74HC595" at 3421.89,-6620.08 h78.74 r90; Dimensions Top "1.45" at 3421.89,-6540.08 h78.74 r90
DD1_P8: Assembly Text Top "74HC595" at 3421.89,-7510.08 h78.74 r90; Dimensions Top "1.45" at 3421.89,-7430.08 h78.74 r90
DD2: Assembly Text Top "74HC595" at 251.38,-7085.91 h78.74 r90; Dimensions Top "1.45" at 251.38,-7005.91 h78.74 r90
DD3: Assembly Text Top "74HC595" at 250.28,-6417.8 h78.74 r90; Dimensions Top "1.45" at 250.28,-6337.8 h78.74 r90